# EAGLE board Multiplicador (EAGLE 9.7.0)

Size 222.64 x 117.24 mm. Coordinates in mm from the lower left corner, seen from the top.
Outline: 0,0 222.64,0 222.64,117.24 0,117.24 0,0
Copper layers (1*16): Top 0.035mm / dielectric 1.5mm / Bottom 0.035mm
Design rules "default": minimum track width 6mil, minimum drill 0.35mm, track to track 6mil, track to pad 6mil, pad to pad 6mil, via to via 6mil, smd to smd 6mil, copper to edge 40mil, drill to drill 6mil, minimum pad ring 10mil, minimum via ring 8mil, stop-mask expansion 4mil, vias tented up to drill 0mil, thermal gap 10mil

## Footprints (pad centres in the part's own frame; a part is rotated, then mirrored left to right if it is on the bottom)
BATTERY-GENERIC = drill 1.118 pad 3.15 octagon: + 2.54,0; - -2.54,0
LEDRD254W60D565H860B = drill 0.981 pad 1.581: 1 -1.27,0; 2 1.27,0
RESAD1016W63L850D250B = drill 0.83 pad 1.43: 1 -5.08,0; 2 5.08,0
78B04ST = drill 0.8: 1 -3.81,-3.81; 2 -1.27,-3.81; 3 1.27,-3.81; 4 3.81,-3.81; 5 3.81,3.81; 6 1.27,3.81; 7 -1.27,3.81; 8 -3.81,3.81
DIP762W53P254L1969H508Q16B = drill 0.743 pad 1.343: 1 -3.81,8.89; 2 -3.81,6.35; 3 -3.81,3.81; 4 -3.81,1.27; 5 -3.81,-1.27; 6 -3.81,-3.81; 7 -3.81,-6.35; 8 -3.81,-8.89; 9 3.81,-8.89; 10 3.81,-6.35; 11 3.81,-3.81; 12 3.81,-1.27; 13 3.81,1.27; 14 3.81,3.81; 15 3.81,6.35; 16 3.81,8.89
DIP762W53P254L1969H508Q14B = drill 0.743 pad 1.343: 1 -3.81,7.62; 2 -3.81,5.08; 3 -3.81,2.54; 4 -3.81,0; 5 -3.81,-2.54; 6 -3.81,-5.08; 7 -3.81,-7.62; 8 3.81,-7.62; 9 3.81,-5.08; 10 3.81,-2.54; 11 3.81,0; 12 3.81,2.54; 13 3.81,5.08; 14 3.81,7.62

## Placement (x,y rotation side)
BAT1  6V  [BATTERY-GENERIC]  8.26,108.98 270 top
D1  RED  [LEDRD254W60D565H860B]  216.58,14.05 180 top
D4  RED  [LEDRD254W60D565H860B]  208.96,14.05 180 top
D5  RED  [LEDRD254W60D565H860B]  201.34,14.05 180 top
D6  RED  [LEDRD254W60D565H860B]  193.72,14.05 180 top
D7  RED  [LEDRD254W60D565H860B]  186.1,14.05 180 top
D8  RED  [LEDRD254W60D565H860B]  178.48,14.05 180 top
D9  RED  [LEDRD254W60D565H860B]  170.86,14.05 180 top
R6  200  [RESAD1016W63L850D250B]  177.21,8.97 90 top
R7  200  [RESAD1016W63L850D250B]  169.59,8.97 90 top
R8  200  [RESAD1016W63L850D250B]  184.83,8.97 90 top
R9  200  [RESAD1016W63L850D250B]  192.45,8.97 90 top
R10  200  [RESAD1016W63L850D250B]  200.07,8.97 90 top
R11  200  [RESAD1016W63L850D250B]  207.69,8.97 90 top
R12  200  [RESAD1016W63L850D250B]  215.31,8.97 90 top
SW1  SPST-478B04ST  [78B04ST]  66.9,84.87 0 top
SW2  SPST-478B04ST  [78B04ST]  79.6,84.87 0 top
U1  74HC283_PDIP  [DIP762W53P254L1969H508Q16B]  127.68,25.48 90 top
U2  74HC283_PDIP  [DIP762W53P254L1969H508Q16B]  102.28,25.48 90 top
U3  74HC283_PDIP  [DIP762W53P254L1969H508Q16B]  76.88,25.48 90 top
U4  74HC08_PDIP  [DIP762W53P254L1969H508Q14B]  101.19,84.87 90 top
U5  74HC08_PDIP  [DIP762W53P254L1969H508Q14B]  124.05,84.87 90 top
U6  74HC08_PDIP  [DIP762W53P254L1969H508Q14B]  146.91,84.87 90 top
U7  74HC08_PDIP  [DIP762W53P254L1969H508Q14B]  169.77,84.87 90 top

## Library data of the parts
BAT1 R6-R12 SW1 SW2 U1-U7 = Tinkercad
D1 D4-D9 = Tinkercad; CATEGORY: Opto-Electronic; SUB-CATEGORY: LED; VALUE: LED_RED

## Nets
BAT1+: BAT1.+ SW1.5 SW1.6 SW1.7 SW1.8 SW2.5 SW2.6 SW2.7 SW2.8 U1.16 U2.16 U3.16 U4.14 U5.14 U6.14 U7.14
BAT1-: BAT1.- R6.1 R7.1 R8.1 R9.1 R10.1 R11.1 R12.1 U1.7 U1.8 U2.7 U2.8 U3.7 U3.8 U3.12 U4.7 U5.7 U6.7 U7.7
D1_C: D1.2 R12.2
D4_C: D4.2 R11.2
D5_C: D5.2 R10.2
D6_C: D6.2 R9.2
D7_C: D7.2 R8.2
D8_C: D8.2 R6.2
D9_C: D9.2 R7.2
U1_A0: U1.5 U2.1
U1_A1: U1.3 U2.13
U1_A2: U1.14 U2.10
U1_A3: U1.12 U2.9
U1_S0: D6.1 U1.4
U1_S1: D7.1 U1.1
U1_S2: D8.1 U1.13
U1_S3: D9.1 U1.10
U2_A0: U2.5 U3.1
U2_A1: U2.3 U3.13
U2_A2: U2.14 U3.10
U2_A3: U2.12 U3.9
U2_S0: D5.1 U2.4
U3_S0: D4.1 U3.4
U4_1Y: D1.1 U4.3
U4_2Y: U3.5 U4.6
U4_3A: SW1.4 U4.1 U4.4 U4.9 U4.12
U4_3Y: U3.14 U4.8
U4_4Y: U3.3 U4.11
U5_1A: SW1.3 U5.1 U5.4 U5.9 U5.12
U5_1Y: U3.6 U5.3
U5_2Y: U3.2 U5.6
U5_3Y: U3.11 U5.8
U5_4Y: U3.15 U5.11
U6_1A: SW1.2 U6.1 U6.4 U6.9 U6.12
U6_1Y: U2.6 U6.3
U6_2Y: U2.2 U6.6
U6_3Y: U2.11 U6.8
U6_4Y: U2.15 U6.11
U7_1B: SW2.4 U4.2 U5.2 U6.2 U7.2
U7_1Y: U1.6 U7.3
U7_2B: SW2.3 U4.5 U5.5 U6.5 U7.5
U7_2Y: U1.2 U7.6
U7_3A: SW1.1 U7.1 U7.4 U7.9 U7.12
U7_3B: SW2.1 U4.10 U5.10 U6.10 U7.10
U7_3Y: U1.11 U7.8
U7_4B: SW2.2 U4.13 U5.13 U6.13 U7.13
U7_4Y: U1.15 U7.11

## Tracks (layer width: path | path; a pad name or v marks a point on that pad's centre or on a via)
BAT1+  (15 unrouted)
BAT1-  (18 unrouted)
D1_C  (1 unrouted)
D4_C  (1 unrouted)
D5_C  (1 unrouted)
D6_C  (1 unrouted)
D7_C  (1 unrouted)
D8_C  (1 unrouted)
D9_C  (1 unrouted)
U1_A0  (1 unrouted)
U1_A1  (1 unrouted)
U1_A2  (1 unrouted)
U1_A3  (1 unrouted)
U1_S0  (1 unrouted)
U1_S1  (1 unrouted)
U1_S2  (1 unrouted)
U1_S3  (1 unrouted)
U2_A0  (1 unrouted)
U2_A1  (1 unrouted)
U2_A2  (1 unrouted)
U2_A3  (1 unrouted)
U2_S0  (1 unrouted)
U3_S0  (1 unrouted)
U4_1Y  (1 unrouted)
U4_2Y  (1 unrouted)
U4_3A  (4 unrouted)
U4_3Y  (1 unrouted)
U4_4Y  (1 unrouted)
U5_1A  (4 unrouted)
U5_1Y  (1 unrouted)
U5_2Y  (1 unrouted)
U5_3Y  (1 unrouted)
U5_4Y  (1 unrouted)
U6_1A  (4 unrouted)
U6_1Y  (1 unrouted)
U6_2Y  (1 unrouted)
U6_3Y  (1 unrouted)
U6_4Y  (1 unrouted)
U7_1B  (4 unrouted)
U7_1Y  (1 unrouted)
U7_2B  (4 unrouted)
U7_2Y  (1 unrouted)
U7_3A  (4 unrouted)
U7_3B  (4 unrouted)
U7_3Y  (1 unrouted)
U7_4B  (4 unrouted)
U7_4Y  (1 unrouted)